# Altium PCB CT9042 Front Board.PcbDoc (part 2 of 2)
Units mm, origin at the board's own origin, x right, y up, seen from the top; angles counter-clockwise.
Board outline 238.25 x 69.25 mm, 4 copper layers (Top Layer, Layer 1, Layer 2, Bottom Layer), stack 1.794 mm thick; 120 components, 105 nets, 430 pads, 140 vias.
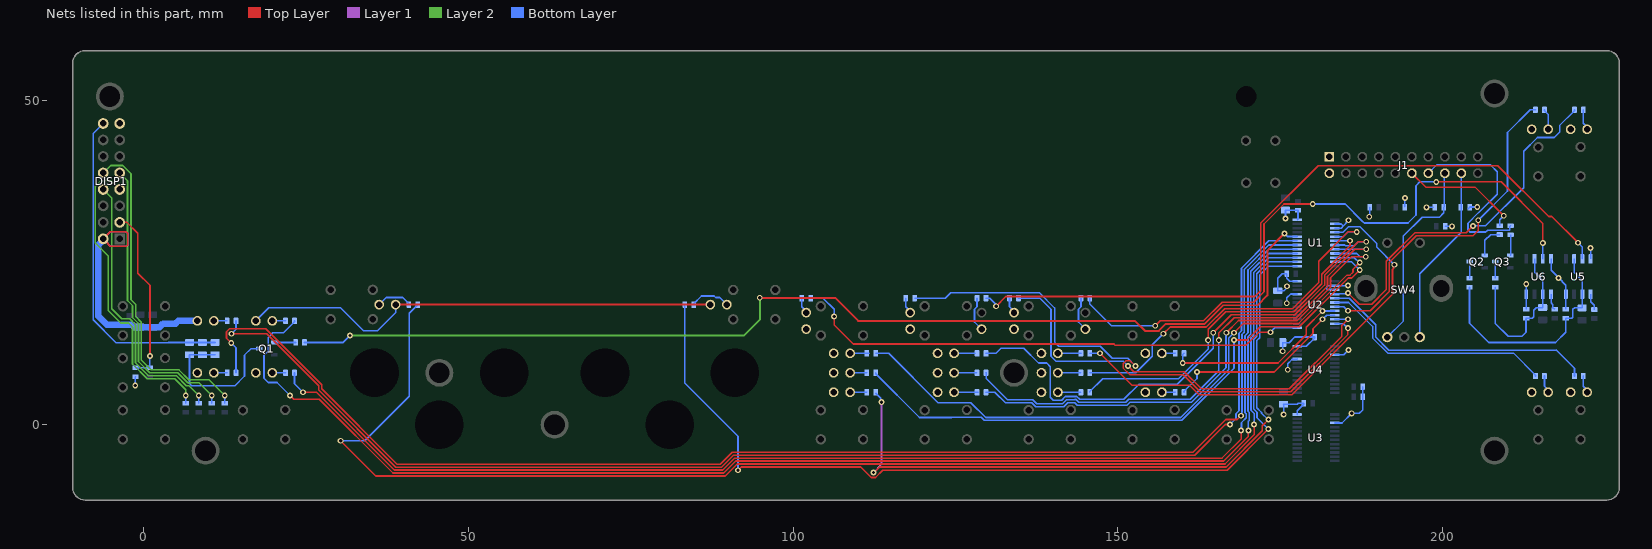
[diagram p4: the nets of this part, all layers, seen from the top]

## Via types
v1: diameter 0.9, hole 0.5, Top Layer to Bottom Layer, tented both sides, 123 vias
v2: diameter 0.9, hole 0.5, Top Layer to Bottom Layer, 17 vias

## Nets (pads, with @x,y where several pads share a name; then routed paths per layer and width w, separated by ;. In a path a pad name is that pad's centre, name@x,y a point inside that pad or via, vN(x,y) a via of type N, cw(c..) or ccw(c..) an arc to the next point about the centre after c; other vN are vias at no path point) (continued)
FP5VD: C1.1 C2.1 C3.1 C4.1 C5.1 C6.1 C7.1 C8.1 C9.1 C10.1 C11.1 D1.2 D2.2 D3.2 D4.2 D5.2 D6.2 D7.2 D8.2 D9.2 D10.2 D11.2 D12.2 D13.2 D14.2 D15.2 D16.2 D17.2 D18.2 D19.2 D20.2 D21.2 D22.2 D23.2 D24.2 DISP1.2 DISP1.15 J1.1 J1.2 R1.2 R2.2 R4.2 R29.2 R30.2 R34.2 R35.2 R159.2 R160.2 R164.2 U1.2 U1.3 U1.24 U2.2 U2.3 U2.21 U2.24 U3.3 U3.24 U4.3 U4.21 U4.24 U5.4 U5.8 U6.4 U6.8 | length 199.9
  Top Layer w0.2: DISP1.2@-6.282,28.617 -5.157,29.742 -2.783,29.742 -2.525,29.483 -2.525,27.675 -2.709,27.492 -5.157,27.492 -5.808,28.143 -5.882,28.143 DISP1.2@-5.95,28.075
  Top Layer w0.254: D3.2@38.771,18.509 D5.2@87.231,18.509
  Layer 1 w0.2: DISP1.2@-6.282,28.617 -5.157,29.742 -2.783,29.742 -2.525,29.483 -2.525,27.675 -2.709,27.492 -5.157,27.492 -5.808,28.143 -5.882,28.143 DISP1.2@-5.95,28.075
  Bottom Layer w0.2: R35.2@212.9,17.765 212.895,17.77 U6.8@212.895,20.1 212.897,20.102 212.897,21.672 v2(212.9,21.675) ; U6.4@216.705,25.55 216.705,23.776 v2(217.869,22.613) 218.995,21.486 U5.8@218.995,20.1 218.995,17.785 R34.2@218.975,17.765 ; v2(222.775,27.225) 222.79,27.21 222.79,25.565 U5.4@222.805,25.55
  Bottom Layer w0.254: v1(-1.325,6.025) -1.325,7.36 R4.2@-1.3,7.385 ; D6.2@17.23,16 19.23,18 30.263,18 33.763,14.5 36,14.5 38.77,17.27 D3.2@38.77,18.5 ; v1(175.375,11.325) 175.375,12.619 C11.1@175.404,12.648 176.398,12.648 177.25,13.5 C10.1@180.31,13.5 ; C9.1@175.49,3.14 C9.1@175.525,3.14 ; v1(175.525,1.575) C9.1@175.525,3.14 ; C5.1@175.807,33.05 175.837,33.02 C4.1@177.737,33.02 177.737,31.646 177.666,31.575 U1.24@177.6,31.575 ; v1(176,18.7) 176.027,18.727 176.027,19.535 176.617,20.125 U2.21@177.6,20.125 ; v1(176.025,21.325) 176.03,21.32 176.03,21.109 175.575,20.654 174.654,20.654 C7.1@174.625,20.625 174.604,20.646 174.604,22.554 175.325,23.275 175.954,23.275 176.01,23.219 176.01,22.548 176.483,22.075 U2.24@177.6,22.075 ; v1(176.15,8.475) 176.15,9.381 176.823,10.054 177.529,10.054 U4.21@177.6,10.125 ; U3.24@177.6,1.575 177.6,2.154 177.99,2.544 178.014,2.544 178.636,3.167 C8.1@178.636,3.302 177.777,3.302 177.621,3.146 ; 177.6,3.14 C9.1@175.525,3.14 ; U4.24@177.6,12.075 179.02,12.075 C10.1@180.31,13.365 ; U3.3@183.4,0.275 184.525,0.275 v1(186,1.75) 187.175,1.75 187.69,2.265 R29.2@187.69,4.325 R30.2@187.69,5.875 ; U4.3@183.4,10.775 184.775,10.775 v1(185.5,11.5) ; U2.3@183.4,20.775 182.294,20.775 182.145,20.924 182.145,21.276 182.294,21.425 U2.2@183.4,21.425 ; U1.3@183.4,30.275 184.377,30.275 184.702,30.6 ; U1.2@183.4,30.925 184.377,30.925 184.702,30.6 ; U2.2@183.471,21.425 v1(185.425,21.425) ; v1(185.5,31.5) 185.5,31.398 184.702,30.6 ; v1(188.7,32.041) 188.81,32.151 R159.2@188.81,33.5 ; R160.2@194.2,33.61 194.195,33.615 194.195,34.92 v1(194.2,34.925) ; v1(197.525,33.475) R2.2@198.587,33.475 ; R164.2@200.415,30.55 v1(201.45,30.55) ; R1.2@204,33.31 204.215,33.525 v1(205.35,33.525)
  Bottom Layer w0.3: v1@175.825,31.762 C5.1@175.825,32.9
  Bottom Layer w1: DISP1.2@-6.282,28.617 -6.282,28.441 -7,27.723 -7,16.722 -5.708,15.43 C1.1@-2.22,15.43 -1.85,15.43 -1.47,15.05 C2.1@-0.625,15.05 1.325,15.05 C3.1@1.338,15.037 ; C3.1@1.35,15.025 1.525,15.025 1.55,15.05 2.429,15.05 2.954,15.575 4.872,15.575 5.297,16 D4.2@8.23,16
  other v1: 175.813,31.75
LED-2mA: R18.2 U1.13 | length 107.4
  Top Layer w0.254: v1(112.35,-7.35) 112.469,-7.35 113.319,-6.5 166.683,-6.5 172.25,-0.933 172.25,-0.15 v1(173.2,0.8)
  Layer 1 w0.254: v1(112.35,-7.35) 113.6,-6.1 v1(113.6,3.475)
  Bottom Layer w0.254: R18.2@112.69,4.865 113.476,4.079 113.476,3.599 v1(113.6,3.475) ; v1(173.2,0.8) 173.106,0.8 172.123,1.783 172.123,1.894 171.398,2.619 171.398,12.972 171.843,13.417 171.843,23.068 173.2,24.425 U1.13@177.6,24.425
LED-20mA: R19.2 U1.11 | length 94.2
  Top Layer w0.254: v1(167.875,13.05) 169.877,13.05 171.901,15.074 177.948,15.074 185.469,22.594 186.019,22.594 v1(187.25,23.825)
  Bottom Layer w0.254: R19.2@112.69,8 112.69,7.865 119.432,1.123 124.413,1.123 124.437,1.147 128.961,1.147 129.439,0.669 159.845,0.669 167.877,8.701 167.877,13.048 v1(167.875,13.05) ; U1.11@183.4,25.075 186,25.075 v1(187.25,23.825)
LED-200mA: R20.2 U1.10 | length 95.8
  Top Layer w0.254: v1(167.875,14.175) 169.288,15.588 177.821,15.588 185.281,23.048 185.748,23.048 186.205,23.505 186.205,23.955 v1(187.25,25)
  Bottom Layer w0.254: R20.2@112.69,11 114.707,11 122.305,3.402 127.348,3.402 129.627,1.123 159.657,1.123 167.098,8.564 167.098,13.398 v1(167.875,14.175) ; U1.10@183.4,25.725 186.408,25.725 187.133,25 v1(187.25,25)
LED-ALT: R28.2 U2.8 | length 29
  Top Layer w0.254: v1(160,9.5) 174.649,9.5 179,13.851 179,15.025 v1(181.5,17.525)
  Bottom Layer w0.254: v1(160,9.5) 160,10.81 R28.2@160.19,11 ; v1(181.5,17.525) U2.8@183.4,17.525
LED-BACKLIGHT: R7.2 U1.20 | length 170.3
  Top Layer w0.3: v1(94.85,19.55) 106.45,19.55 110,16 152.625,16 154.175,14.45 156.319,14.45 157.394,15.525 163.375,15.525 166.252,18.402 171.51,18.402 173.029,19.92 173.029,26.829 v1(175.65,29.45)
  Layer 2 w0.3: v1(31.725,13.725) 92.4,13.725 94.85,16.175 v1(94.85,19.55)
  Bottom Layer w0.3: R7.2@24.74,12.675 30.675,12.675 v1(31.725,13.725) ; v1(175.65,29.45) 176.125,28.975 U1.20@177.6,28.975
LED-BIP: R12.2 U1.19 | length 202.8
  Top Layer w0.254: v1(13.5,14) 18.901,14 26.921,5.98 26.921,5.338 38.788,-6.529 88.946,-6.529 90.791,-4.684 161.816,-4.684 166.525,0.025 v1(167.25,0.025)
  Bottom Layer w0.254: v1(13.5,14) 14.19,14.69 R12.2@14.19,16 ; v1(167.25,0.025) 168.198,0.973 168.198,1.697 168.652,2.151 168.652,14.078 169.025,14.451 169.025,24.102 173.248,28.325 U1.19@177.6,28.325
LED-CHA: R16.2 U1.15 | length 206.8
  Top Layer w0.254: v1@30.162,-2.338 35.714,-7.891 89.51,-7.891 91.355,-6.046 166.495,-6.046 170.975,-1.566 v1(170.975,0.05)
  Bottom Layer w0.254: v1(30.301,-2.478) 34.022,-2.478 40.875,4.375 40.875,17.185 R16.2@42.19,18.5 ; v1(170.975,0.05) 170.975,1.758 170.49,2.243 170.49,13.348 170.935,13.793 170.935,23.444 173.216,25.725 U1.15@177.6,25.725
LED-CHB: R17.2 U1.14 | length 146.5
  Top Layer w0.254: v1(91.5,-7) 92,-6.5 110.401,-6.5 112.028,-8.127 112.672,-8.127 113.799,-7 166.825,-7 v1(173.175,-0.65)
  Bottom Layer w0.254: R17.2@83.31,18.5 83.31,6.415 91.5,-1.775 v1(91.5,-7) ; v1(173.175,-0.65) 171.429,1.096 171.429,1.946 170.944,2.431 170.944,13.16 171.389,13.605 171.389,23.256 173.208,25.075 U1.14@177.6,25.075
LED-FET: R15.2 U1.16 | length 205.7
  Top Layer w0.254: v1(22.5,4.5) 23.075,3.925 27,3.925 38.362,-7.437 89.322,-7.437 91.167,-5.592 166.307,-5.592 170.1,-1.799 v1(170.1,-0.875)
  Bottom Layer w0.254: v1(22.5,4.5) 20.5,6.5 19.167,6.5 18.5,7.167 18.5,10.675 19.125,11.3 19.125,13.445 19.855,14.175 21.5,14.175 23.19,15.865 R15.2@23.19,16 ; v1(170.1,-0.875) 170.1,0.552 170.206,0.658 170.206,1.885 170.036,2.055 170.036,13.536 170.481,13.981 170.481,23.632 173.224,26.375 U1.16@177.6,26.375
LED-I-VAR: R33.2 U2.11 | length 88.2
  Top Layer w0.254: v1(152.7,9.05) 151.923,9.827 151.253,9.827 150.798,9.372 150.798,8.728 151.851,7.675 160.084,7.675 162.69,5.069 176.602,5.069 185.425,13.892 v1(185.425,14.875)
  Bottom Layer w0.254: R33.2@118.69,19.5 123.427,19.5 124.249,20.322 137.917,20.322 140.25,17.989 140.25,12.733 140.906,12.077 147.272,12.077 149.13,10.219 151.531,10.219 v1(152.7,9.05) ; U2.11@183.4,15.575 184.725,15.575 v1(185.425,14.875)
LED-ILIMIT: J1.12 R36.2 | length 18.6
  Top Layer w0.254: J1.12@195.27,38.73 197.4,36.6 205,36.6 v2(209.425,32.175)
  Bottom Layer w0.254: R36.2@208.825,30.665 208.825,31.575 v2(209.425,32.175)
LED-MRK-1: R8.2 U2.7 | length 52.8
  Top Layer w0.254: v1(185.425,17.55) 188.842,17.55 191.798,20.506 191.798,24.972 195.953,29.127 204.702,29.127 205.5,29.925 v1(205.5,31.5)
  Bottom Layer w0.254: U2.7@183.4,18.175 184.8,18.175 v1(185.425,17.55) ; v1(205.5,31.5) 210,36 210,45 213.5,48.5 R8.2@214.31,48.5
LED-MRK-2: R11.2 U2.4 | length 56.6
  Top Layer w0.254: v1(185.425,20.3) 187.152,18.573 189.081,18.573 191.344,20.836 191.344,25.16 195.765,29.581 203.656,29.581 v1(204.7,30.625)
  Bottom Layer w0.254: U2.4@183.4,20.125 183.471,20.196 185.321,20.196 v1(185.425,20.3) ; v1(204.7,30.625) 206.625,30.625 212.5,36.5 212.5,42.125 214.615,44.24 217.215,44.24 218.025,45.05 218.025,46.08 220.31,48.365 R11.2@220.31,48.5
LED-MRK-A: R9.2 U2.6 | length 36.7
  Bottom Layer w0.254: U2.6@183.4,18.825 185.525,18.825 189.225,15.125 189.225,13.346 191.538,11.033 210.912,11.033 214.31,7.635 R9.2@214.31,7.5
LED-MRK-B: R10.2 U2.5 | length 43.7
  Bottom Layer w0.254: U2.5@183.4,19.475 185.624,19.475 189.7,15.399 189.7,13.513 191.726,11.487 217.487,11.487 217.5,11.5 220.31,8.69 R10.2@220.31,7.5
LED-NPN: R14.2 U1.17 | length 190.5
  Top Layer w0.254: v1(24.5,5) 26.567,5 38.55,-6.983 89.134,-6.983 90.979,-5.138 166.037,-5.138 168.975,-2.2 v1(168.975,-0.875)
  Bottom Layer w0.254: R14.2@23.19,8 23.19,6.31 v1(24.5,5) ; v1(168.975,-0.875) 169.03,-0.82 169.03,0.331 169.752,1.053 169.752,1.697 169.582,1.867 169.582,13.724 170.027,14.169 170.027,23.82 173.232,27.025 U1.17@177.6,27.025
LED-P-VAR: R32.2 U2.10 | length 68.3
  Top Layer w0.254: v1(151.575,9.05) 152.45,8.175 160.226,8.175 162.878,5.523 176.414,5.523 184.5,13.609 184.5,15.325 v1(185.425,16.25)
  Bottom Layer w0.254: R32.2@134.69,19.5 138,19.5 139.693,17.807 139.693,10.554 140.497,9.75 150.875,9.75 v1(151.575,9.05) ; U2.10@183.4,16.225 183.413,16.238 185.413,16.238 v1(185.425,16.25)
LED-PLIMIT: J1.14 R37.2 | length 29.9
  Bottom Layer w0.254: J1.14@197.81,38.73 199.08,40 207.375,40 208.425,38.95 208.425,35.501 205.599,32.675 205.55,32.675 203.923,31.048 203.923,29.952 204.195,29.68 206.653,29.68 206.945,29.972 209.403,29.972 209.425,29.95 210.326,29.95 210.326,30.491 R37.2@210.475,30.64
LED-PMAX4W: R26.2 U1.4 | length 72.6
  Top Layer w0.254: v1(147.25,11) 152.173,6.077 161.04,6.077 162.502,4.615 176.814,4.615 192.296,20.097 192.296,23.914 192.451,24.07 192.451,24.526 v1(192.575,24.65)
  Bottom Layer w0.254: R26.2@145.69,11 v1(147.25,11) ; U1.4@183.4,29.625 184.675,29.625 185.527,30.477 187.297,30.477 189.853,27.921 189.853,27.372 v1(192.575,24.65)
LED-PMAX40mW: R24.2 U1.6 | length 55.2
  Top Layer w0.254: v1(163.9,13.025) 163.9,13.851 163.898,13.853 163.898,14.497 163.9,14.499 163.9,14.683 166.621,17.404 177.069,17.404 181.379,21.714 181.379,23.199 185.75,27.57 v1(185.75,28.325)
  Bottom Layer w0.254: R24.2@145.69,5 145.69,5.135 147.647,7.092 159.333,7.092 163.9,11.659 v1(163.9,13.025) ; U1.6@183.4,28.325 v1(185.75,28.325)
LED-PMAX400mW: R25.2 U1.5 | length 56.7
  Top Layer w0.254: v1(157,14) 158.048,15.048 163.623,15.048 166.446,17.871 170.548,17.871 170.552,17.875 176.898,17.875 180.925,21.902 180.925,25.196 185.429,29.7 v1(186.775,29.7)
  Bottom Layer w0.254: R25.2@145.69,8 152.753,8 155.307,10.554 155.307,12.307 v1(157,14) ; U1.5@183.4,28.975 184.704,28.975 185.429,29.7 v1(186.775,29.7)
LED-PNP: R13.2 U1.18 | length 207.9
  Top Layer w0.254: v1(13.45,12.6) 12.723,13.327 12.723,14.322 13.178,14.777 18.766,14.777 27.375,6.168 27.375,5.526 38.976,-6.075 88.758,-6.075 90.603,-4.23 161.578,-4.23 166.61,0.802 168.373,0.802 168.946,1.375 v1(168.975,1.375)
  Bottom Layer w0.254: v1(13.45,12.6) 14.19,11.86 R13.2@14.19,8 ; v1(168.975,1.375) 169.099,1.499 169.099,1.955 169.106,1.963 169.106,13.89 169.479,14.263 169.479,23.914 173.24,27.675 U1.18@177.6,27.675
LED-RUNSTOP: R27.2 U2.9 | length 29.2
  Top Layer w0.254: v1(162.175,8.125) 174.076,8.125 180.052,14.101 180.052,14.802 v1(181.5,16.25)
  Bottom Layer w0.254: R27.2@160.19,5 160.19,5.135 162.175,7.12 v1(162.175,8.125) ; v1(181.5,16.25) 181.525,16.25 182.15,16.875 U2.9@183.4,16.875
LED-V-VAR: R31.2 U2.13 | length 80.4
  Top Layer w0.254: v1(106.3,16.65) 106.3,15.371 109.24,12.431 149.41,12.431 149.593,12.248 169.7,12.248 170.048,12.596 170.065,12.596 171.719,14.25 v1(173.5,14.25)
  Bottom Layer w0.254: R31.2@102.69,19.5 104.594,19.5 106.3,17.794 v1(106.3,16.65) ; v1(173.5,14.25) 174.175,14.925 U2.13@177.6,14.925
LED-VMAX2V: R21.2 U1.9 | length 78.3
  Top Layer w0.254: v1(166.7,14.175) 168.567,16.042 177.633,16.042 182.741,21.15 182.741,22.635 185.981,25.875 v1(188.175,25.875)
  Bottom Layer w0.254: R21.2@129.69,5 131.058,5 132.681,3.377 136.717,3.377 137.326,2.768 141.649,2.768 142.283,3.402 143.359,3.402 143.761,3 151.406,3 151.856,3.45 161.342,3.45 166.644,8.752 166.644,14.119 v1(166.7,14.175) ; U1.9@183.4,26.375 186.8,26.375 187.3,25.875 v1(188.175,25.875)
LED-VMAX10V: R22.2 U1.8 | length 80.4
  Top Layer w0.254: v1(165.55,13.025) 165.55,14.124 167.922,16.496 177.445,16.496 182.287,21.338 182.287,22.823 186.494,27.03 v1(188.25,27.03)
  Bottom Layer w0.254: R22.2@129.69,8 129.702,7.988 129.702,7.124 132.995,3.831 136.905,3.831 137.514,3.222 141.461,3.222 142.095,3.856 143.357,3.856 143.405,3.904 143.499,3.904 143.565,3.838 143.949,3.454 151.218,3.454 151.668,3.904 161.154,3.904 165.55,8.3 v1(165.55,13.025) ; U1.8@183.4,27.025 v1@188.246,27.025
LED-VMAX40V: R23.2 U1.7 | length 82.9
  Top Layer w0.254: v1(164.675,14.175) 167.45,16.95 177.257,16.95 181.833,21.526 181.833,23.011 186.997,28.175 v1(188.25,28.175)
  Bottom Layer w0.254: R23.2@129.69,11 131.221,11 132,11.779 135.508,11.779 137.787,9.5 139.021,9.5 139.571,8.95 139.571,4.254 140.044,3.781 141.331,3.781 141.908,4.358 143.217,4.358 143.593,4.358 143.687,4.358 144.137,3.908 150.908,3.908 153.252,6.252 159.135,6.252 164.677,11.794 164.677,14.173 v1(164.675,14.175) ; U1.7@183.4,27.675 184.936,27.675 185.063,27.548 186.381,27.548 187.008,28.175 v1(188.25,28.175)
NetC12_1: C12.1 R34.1 R38.2 U5.2 U5.6 | length 36.4
  Bottom Layer w0.2: R34.1@218.975,16.385 219.91,16.385 220.075,16.55 220.075,17.75 220.325,18 C12.1@221.5,18 221.535,18.035 U5.6@221.535,20.1 221.535,22.19 220.265,23.46 U5.2@220.265,25.55
  Bottom Layer w0.254: R38.2@204.15,21.185 204.15,15.65 207.125,12.675 217.4,12.675 218.975,14.25 R34.1@218.975,16.385
NetC13_1: C13.1 R35.1 R39.2 U6.2 U6.6 | length 25.4
  Bottom Layer w0.2: R35.1@212.9,16.385 213.785,16.385 214.05,16.65 214.05,17.633 214.467,18.05 C13.1@215.425,18.05 215.435,18.06 U6.6@215.435,20.1 215.435,22.19 214.165,23.46 U6.2@214.165,25.55
  Bottom Layer w0.254: R39.2@208.125,21.16 208.125,15.585 210.105,13.605 212.23,13.605 212.85,14.225 212.85,16.335 R35.1@212.9,16.385
NetC14_1: C14.1 U5.5 | length 2.6
  Bottom Layer w0.2: U5.5@222.805,20.1 222.805,18.97 223.375,18.4 C14.1@223.375,17.74
NetC15_1: C15.1 U6.5 | length 2.6
  Bottom Layer w0.2: U6.5@216.705,20.1 216.705,18.795 216.995,18.505 216.995,18.025 217.255,17.765 C15.1@217.3,17.765
NetD1_1: D1.1 R11.1 | length 3.2
  Bottom Layer w0.254: R11.1@221.69,48.5 221.69,46.437 222.272,45.855 D1.1@222.272,45.518
NetD2_1: D2.1 R8.1 | length 3.2
  Bottom Layer w0.254: R8.1@215.69,48.5 215.69,48.365 216.272,47.783 D2.1@216.272,45.518
NetD3_1: D3.1 R16.1 | length 5.6
  Bottom Layer w0.254: D3.1@36.231,18.509 37.308,19.586 39.859,19.586 40.81,18.635 R16.1@40.81,18.5
NetD4_1: D4.1 R12.1 | length 2
  Bottom Layer w0.2: D4.1@10.77,16 R12.1@12.81,16
NetD5_1: D5.1 R17.1 | length 6.3
  Bottom Layer w0.254: R17.1@84.69,18.5 84.69,18.635 85.882,19.827 87.8,19.827 88.041,19.586 88.694,19.586 D5.1@89.771,18.509
NetD6_1: D6.1 R15.1 | length 2
  Bottom Layer w0.254: D6.1@19.771,16.009 21.801,16.009 R15.1@21.81,16
NetD7_1: D7.1 R20.1 | length 2.9
  Bottom Layer w0.254: D7.1@108.771,11.009 108.78,11 111.67,11
NetD8_1: D8.1 R23.1 | length 3.2
  Bottom Layer w0.254: D8.1@124.77,11 R23.1@128,11
NetD9_1: D9.1 R26.1 | length 3.5
  Bottom Layer w0.254: D9.1@140.77,11 143.81,11 R26.1@144.31,11
NetD10_1: D10.1 R28.1 | length 2
  Bottom Layer w0.254: D10.1@156.771,11.009 158.801,11.009 R28.1@158.81,11
NetD11_1: D11.1 R13.1 | length 2
  Bottom Layer w0.254: D11.1@10.77,8 R13.1@12.81,8
NetD12_1: D12.1 R14.1 | length 2
  Bottom Layer w0.254: D12.1@19.771,8.009 21.801,8.009 R14.1@21.81,8
NetD13_1: D13.1 R19.1 | length 2.5
  Bottom Layer w0.254: D13.1@108.771,8.009 111.301,8.009 R19.1@111.31,8
NetD14_1: D14.1 R22.1 | length 3.5
  Bottom Layer w0.254: D14.1@124.77,8 127.31,8 R22.1@128.25,8
NetD15_1: D15.1 R25.1 | length 3.5
  Bottom Layer w0.254: D15.1@140.77,8 R25.1@144.25,8
NetD16_1: D16.1 R18.1 | length 2.5
  Bottom Layer w0.254: D16.1@108.771,5.009 111.301,5.009 R18.1@111.31,5
NetD17_1: D17.1 R21.1 | length 3.7
  Bottom Layer w0.254: D17.1@124.77,5 127.31,5 ; 127.31,5 R21.1@128.5,5
NetD18_1: D18.1 R24.1 | length 3.5
  Bottom Layer w0.254: D18.1@140.77,5 R24.1@144.25,5
NetD19_1: D19.1 R27.1 | length 2
  Bottom Layer w0.254: D19.1@156.771,5.009 158.801,5.009 R27.1@158.81,5
NetD20_1: D20.1 R10.1 | length 2.7
  Bottom Layer w0.254: R10.1@221.69,7.5 221.69,5.927 222.271,5.346 D20.1@222.271,5.009
NetD21_1: D21.1 R9.1 | length 2.7
  Bottom Layer w0.254: R9.1@215.69,7.5 215.69,5.927 216.271,5.346 D21.1@216.271,5.009
NetD22_1: D22.1 R31.1 | length 2.5
  Bottom Layer w0.254: R31.1@101.31,19.5 101.31,18.179 102,17.489 D22.1@102,17.27
NetD23_1: D23.1 R33.1 | length 2.5
  Bottom Layer w0.254: R33.1@117.31,19.5 117.31,18.179 118,17.489 D23.1@118,17.25
NetD24_1: D24.1 R32.1 | length 2.5
  Bottom Layer w0.254: R32.1@133.31,19.5 133.31,18.179 134,17.489 D24.1@134,17.25
NetD40_2: D40.2 R165.1 | length 5.4
  Bottom Layer w0.254: R165.1@128.31,19.5 128.31,18.171 127.923,17.784 127.923,15.807 D40.2@129,14.73
NetD47_2: D47.2 R166.1 | length 5.4
  Bottom Layer w0.254: R166.1@144.31,19.5 144.31,18.171 143.923,17.784 143.923,15.807 D47.2@145,14.73
NetDISP1_3: DISP1.3 R4.1 R161.2 | length 27.2
  Top Layer w0.254: DISP1.3@-3.742,31.157 -2.602,31.157 -0.932,29.487 -0.932,23.353 0.925,21.495 v1(0.925,10.575)
  Bottom Layer w0.254: R4.1@-1.3,8.765 -1.288,8.777 0.888,8.777 R161.2@0.9,8.79 0.9,10.55 v1(0.925,10.575)
NetDISP1_7: DISP1.7 R3.1 | length 47.1
  Layer 2 w0.254: DISP1.7@-3.742,36.237 -5.055,37.55 -6.675,37.55 -7.5,36.725 -7.5,28 -5.5,26 -5.5,17.606 -3.572,15.678 -2.322,15.678 -1.75,15.106 -1.75,9.355 0.525,7.08 4.745,7.08 6.45,5.375 v1(6.45,4.5)
  Bottom Layer w0.254: R3.1@6.45,3.29 v1(6.45,4.5)
NetDISP1_8: DISP1.8 R5.1 | length 42.5
  Layer 2 w0.254: DISP1.8@-6.282,36.237 -4.975,34.93 -4.975,17.875 -3.422,16.322 -2.203,16.322 -1.296,15.415 -1.296,9.543 0.713,7.534 5.021,7.534 6.54,6.015 6.935,6.015 v1(8.45,4.5)
  Bottom Layer w0.254: R5.1@8.45,3.29 v1(8.45,4.5)
NetDISP1_9: DISP1.9 R157.1 | length 44.9
  Layer 2 w0.254: DISP1.9@-3.742,38.777 -2.525,37.56 -2.525,19.119 -1.756,18.35 -1.756,16.517 -0.842,15.603 -0.842,9.731 0.901,7.988 5.209,7.988 6.728,6.469 8.481,6.469 v1(10.45,4.5)
  Bottom Layer w0.254: R157.1@10.45,3.29 v1(10.45,4.5)
NetDISP1_10: DISP1.10 R158.1 | length 51
  Layer 2 w0.254: DISP1.10@-6.282,38.777 -5.13,39.929 -3.265,39.929 -2,38.664 -2,19.236 -1.277,18.513 -1.277,16.68 -0.388,15.791 -0.388,9.96 1.13,8.442 5.397,8.442 6.916,6.923 10.027,6.923 v1(12.45,4.5)
  Bottom Layer w0.254: R158.1@12.45,3.29 v1(12.45,4.5)
NetDISP1_16: DISP1.16 R6.2 R162.2 R163.2 | length 51.1
  Bottom Layer w0.254: DISP1.16@-6.282,46.397 -7.827,44.851 -7.827,16.15 -4.3,12.623 3.717,12.623 3.769,12.675 R162.2@7.025,12.675 R163.2@9,12.675 R6.2@10.95,12.675
NetQ1_1: Q1.1 R7.1 | length 3.3
  Bottom Layer w0.254: Q1.1@20.075,12.675 R7.1@23.36,12.675
NetQ1_3: Q1.3 R6.1 R162.1 R163.1 | length 23.5
  Bottom Layer w0.254: R6.1@10.95,10.775 R163.1@9,10.775 R162.1@7.025,10.775 7.025,6.35 7.35,6.025 14.025,6.025 15.5,7.5 15.5,10.725 16.5,11.725 Q1.3@17.775,11.725
NetQ2_1: Q2.1 R36.1 | length 5
  Bottom Layer w0.2: Q2.1@206.475,26.075 206.475,28.375 207.385,29.285 R36.1@208.825,29.285
NetQ2_3: Q2.3 R38.1 | length 2.6
  Bottom Layer w0.2: R38.1@204.15,22.565 204.153,22.567 204.153,25.102 Q2.3@204.175,25.125
NetQ3_1: Q3.1 R37.1 | length 3.2
  Bottom Layer w0.2: Q3.1@210.45,26.075 210.473,26.097 210.473,29.258 R37.1@210.475,29.26
NetQ3_3: Q3.3 R39.1 | length 2.6
  Bottom Layer w0.2: R39.1@208.125,22.54 208.127,22.542 208.127,25.102 Q3.3@208.15,25.125
NetR165_2: R165.2 U5.3 | length 114.6
  Top Layer w0.254: v1(131.25,18.25) 132.75,19.75 171.093,19.75 172,20.657 172,31.067 180.833,39.9 208.525,39.9 216.35,32.075 216.825,32.075 v2(220.875,28.025)
  Bottom Layer w0.254: R165.2@129.69,19.5 130.25,19.5 131.25,18.5 v1(131.25,18.25) ; v2(220.875,28.025) 221.535,27.365 U5.3@221.535,25.55
NetR166_2: R166.2 U6.3 | length 100.6
  Top Layer w0.254: v1(155.75,15.25) 156.502,16.002 163.177,16.002 166.054,18.879 170.914,18.879 172.5,20.465 172.5,30.925 175.575,34 v1(180,34) ; v2(199.025,37.4) 209.05,37.4 215.45,31 v2(215.45,28)
  Bottom Layer w0.254: R166.2@145.69,19.5 145.69,18.56 149.027,15.223 155.723,15.223 v1(155.75,15.25) ; v1(180,34) 185,34 187.639,31.361 187.925,31.075 194.674,31.075 195.905,32.306 195.905,36.825 196.48,37.4 v2(199.025,37.4) ; U6.3@215.435,25.55 215.443,25.558 215.443,27.992 v2(215.45,28)
ROT-PHA: J1.16 R2.1 SW4.A | length 30.3
  Bottom Layer w0.254: SW4.A@191.5,13.5 193.973,15.973 193.973,29.098 196.85,31.975 199.525,31.975 200.19,32.64 R2.1@200.19,33.5 ; R2.1@200.27,33.58 200.27,38.65 J1.16@200.35,38.73
ROT-PHB: J1.18 R1.1 SW4.B | length 27.6
  Bottom Layer w0.254: SW4.B@196.479,13.759 196.479,23.25 202.89,29.661 202.89,33.5 J1.18@202.89,38.73
pads on no net: J1.7 SW1.2 SW1.3 SW2.1 SW2.4 SW3.1 SW3.4 SW4.M1 SW4.M2 SW5.2 SW5.3 SW6.1 SW6.4 SW7.1 SW7.4 SW8.2 SW8.3 SW9.2 SW9.3 SW10.2 SW10.3 SW11.2 SW11.3 SW12.1 SW12.4 SW14.2 SW14.3 SW15.1 SW15.4 SW16.1 SW16.4 SW17.1 SW17.4 SW18.1 SW18.4 SW19.2 SW19.3 SW20.1 SW20.4 U1.1 U2.1 U2.14 U2.15 U2.16 U2.17 U2.18 U2.19 U2.20 U4.7 U4.8 U4.9 U4.10 U4.11 U4.13 U4.14 U4.15 U4.16 U4.17 U4.18 U4.19 U4.20 U5.7 U6.7
copper on no net: | length 1.5
  Bottom Layer w0.254: 144.997,19.821 145,19.818 145,18.347

## Polygon pours and split planes (outlines as drawn)
FGND on Layer 1 "AGND" (solid, remove dead copper, pour order 0): 231,-13 231,59 -14,59 -14,-13
FP5VD on Layer 2 "AGND" (solid, remove dead copper, pour order 1): 231,-13 231,59 -14,59 -14,-13 229,-13
FGND on Top Layer "AGND" (solid, remove dead copper, pour order 3): -13.127,58.127 -13.127,-11.489 228.873,-11.489 228.873,58.127
FGND on Bottom Layer "AGND" (solid, remove dead copper, pour order 2): -13,58 -13,-11.616 229,-11.616 229,58

## Keep-outs
Keep-Out Layer:
  lines w1: 165.951,22.709 cw(c165.451,22.709) 165.451,22.209 4.051,22.209 cw(c4.051,22.709) 3.551,22.709 3.55,25.493 ccw(c3.05,25.493) 3.05,25.993 1.875,25.993 cw(c1.875,26.493) 1.375,26.493 1.375,48.125 cw(c1.875,48.125) 1.875,48.625 3.05,48.625 ccw(c3.05,49.125) 3.55,49.125 3.55,51.909 3.551,51.909 cw(c4.051,51.909) 4.051,52.409 165.451,52.409 cw(c165.451,51.909) 165.951,51.909 ; 165.951,22.709 165.952,22.709 ; 165.952,22.709 165.952,25.493 cw(c166.452,25.493) 166.452,25.993 167.627,25.993 ccw(c167.627,26.493) 168.127,26.493 168.127,48.125 ccw(c167.627,48.125) 167.627,48.625 166.452,48.625 cw(c166.452,49.125) 165.952,49.125 165.952,51.909 ; 165.951,51.909 165.952,51.909 ; -10.999,-9.616 -10.999,55.634 -10.96,56.024 -10.847,56.399 -10.662,56.745 -10.413,57.048 -10.11,57.297 -9.764,57.482 -9.389,57.596 -8.999,57.634 225.251,57.634 225.641,57.596 226.016,57.482 226.362,57.297 226.665,57.048 226.914,56.745 227.099,56.399 227.213,56.024 227.251,55.634 227.251,-9.616 227.213,-10.006 227.099,-10.381 226.914,-10.727 226.665,-11.03 226.362,-11.279 226.016,-11.464 225.641,-11.578 225.251,-11.616 -8.999,-11.616 -9.389,-11.578 -9.764,-11.464 -10.11,-11.279 -10.413,-11.03 -10.662,-10.727 -10.847,-10.381 -10.96,-10.006 -10.999,-9.616

## Silkscreen, mask and mechanical layers (free items; w line width, h text height)
Top Overlay:
  drawing of 75 lines, arcs and shapes, not listed
  text "SILICONVALLEYGARAGE" at 203.125,25.9 h2.3
  text "INSTRUMENTS" at 203.125,21.246 h2.3
  text "0" at 205.045,15.58 h5
  text "PUBLIC / DOMAIN" at 208.186,15.13 h2.5
  text "https://github.com/vincent-himpe/CurveTraceNew" at 188.166,8.783 h2
FACEPLATE:
  lines w0.05: 3.55,22.709 3.55,25.493 ccw(c3.05,25.493) 3.05,25.993 1.875,25.993 cw(c1.875,26.493) 1.375,26.493 1.375,48.125 cw(c1.875,48.125) 1.875,48.625 3.05,48.625 ccw(c3.05,49.125) 3.55,49.125 3.55,51.909 ; 3.551,22.709 ccw(c4.051,22.709) 4.051,22.209 165.451,22.209 ccw(c165.451,22.709) 165.951,22.709 165.952,25.493 cw(c166.452,25.493) 166.452,25.993 167.627,25.993 ccw(c167.627,26.493) 168.127,26.493 168.127,48.125 ccw(c167.627,48.125) 167.627,48.625 166.452,48.625 cw(c166.452,49.125) 165.952,49.125 165.952,51.909 ccw(c165.451,51.909) 165.451,52.409 4.051,52.409 ccw(c4.051,51.909) 3.551,51.909
  lines w0.2: 165.951,48.075 173.251,48.075 173.251,54.059
Top 3D Body:
  lines w0.15: -12.999,-8.152 -10.999,-8.152 ; -10,-13.025 -8,-13.025
FRONT GRAPHICS:
  drawing of 227 lines, arcs and shapes, not listed
  text "SILICONVALLEYGARAGE" at -7,52 h2.3
  text "MARKER / TRACE" at 166,50 h4
  text "CT9084 Curve Tracer" at 14.992,48.688 h7
  text "INSTRUMENTS" at -7,47.346 h2.3
  text "1" at 214.661,47.202 h3
  text "2" at 220.476,47.206 h3
  text "Marker" at 164,45.879 h4
  text "Page" at 169.514,44.975 h3
  text "SETUP" at -5,23.5 h4
  text "DUT" at 29,23.5 h4
  text "Vmax" at 102,23.5 h4
  text "Imax" at 118,23.5 h4
  text "Pmax" at 134,23.5 h4
  text "Run" at 150,23.5 h4
  text "VAR" at 100,20.211 h3
  text "VAR" at 116,20.211 h3
  text "VAR" at 132,20.211 h3
  text "ALT" at 148,20.211 h3
  text "A" at 35.001,19.25 h4
  text "B" at 86,19.25 h4
  text "BIPOLAR" at 4.843,18.211 h3
  text "FET" at 16.761,18.211 h3
  text "VAR" at 100.474,17.974 h2
  text "VAR" at 116.474,17.974 h2
  text "VAR" at 132.474,17.974 h2
  text "!" at 144.864,17.775 h2
  text "40V" at 110.271,10.447 h2.1
  text "200mA" at 124.773,10.456 h2.1
  text "4W" at 140.771,10.447 h2.1
  text "P" at 8.925,10.211 h3
  text "N" at 17.792,10.211 h3
  text "10V" at 110.27,7.444 h2.1
  text "20mA" at 124.773,7.456 h2.1
  text "0.4W" at 140.77,7.447 h2.1
  text "A" at 214.221,6.711 h3
  text "B" at 220.408,6.711 h3
  text "2mA" at 124.773,4.447 h2.1
  text "40mW" at 140.771,4.447 h2.1
  text "2V" at 110.271,4.438 h2.1
  text "Setup" at 15.53,-5.544 h3
  text "DUT" at 215.801,-5.776 h3
  text "Select" at 166.425,-5.821 h3
  text "Trace" at 183.741,-6.034 h4
  text "Range" at 100,-6.054 h3
  text "Range" at 116,-6.054 h3
  text "Range" at 132,-6.054 h3
  text "Run/Stop" at 148,-6.062 h3
  text "Power" at -4.999,-7.528 h4
Board:
  lines w0.05: 8.551,29.059 9.551,29.059 161.051,29.059 161.051,45.559 8.551,45.559 8.551,37.309 8.551,29.059
  lines w0.1: -10.999,-9.616 -10.96,-10.006 -10.847,-10.381 -10.662,-10.727 -10.413,-11.03 -10.11,-11.279 -9.764,-11.464 -9.389,-11.578 -8.999,-11.616 225.251,-11.616 225.641,-11.578 226.016,-11.464 226.362,-11.279 226.665,-11.03 226.914,-10.727 227.099,-10.381 227.213,-10.006 227.251,-9.616 227.251,55.634 227.213,56.024 227.099,56.399 226.914,56.745 226.665,57.048 226.362,57.297 226.016,57.482 225.641,57.596 225.251,57.634 -8.999,57.634 -9.389,57.596 -9.764,57.482 -10.11,57.297 -10.413,57.048 -10.662,56.745 -10.847,56.399 -10.96,56.024 -10.999,55.634 -10.999,-9.616 ; -8.749,-8.316 224.751,-8.316 224.751,54.334 -8.749,54.334 -8.749,-8.316
  text "BORDER" at 98.829,-10.435 h3

## Text inside footprints (layer, text, board x,y; h text height)
D1: Top Overlay "+" at 217.95,45.15 h0.8
D2: Top Overlay "+" at 211.95,45.15 h0.8
D3: Top Overlay "+" at 40.55,18.85 h0.8 r180
D4: Top Overlay "+" at 6.45,15.65 h0.8
D5: Top Overlay "+" at 85.45,18.15 h0.8
D6: Top Overlay "+" at 15.45,15.65 h0.8
D7: Top Overlay "+" at 104.45,10.65 h0.8
D8: Top Overlay "+" at 120.45,10.65 h0.8
D9: Top Overlay "+" at 136.45,10.65 h0.8
D10: Top Overlay "+" at 152.45,10.65 h0.8
D11: Top Overlay "+" at 6.45,7.65 h0.8
D12: Top Overlay "+" at 15.45,7.65 h0.8
D13: Top Overlay "+" at 104.45,7.65 h0.8
D14: Top Overlay "+" at 120.45,7.65 h0.8
D15: Top Overlay "+" at 136.45,7.65 h0.8
D16: Top Overlay "+" at 104.45,4.65 h0.8
D17: Top Overlay "+" at 120.45,4.65 h0.8
D18: Top Overlay "+" at 136.45,4.65 h0.8
D19: Top Overlay "+" at 152.45,4.65 h0.8
D20: Top Overlay "+" at 217.95,4.65 h0.8
D21: Top Overlay "+" at 211.95,4.65 h0.8
D22: Top Overlay "+" at 102.35,12.95 h0.8 r90
D23: Top Overlay "+" at 118.35,12.95 h0.8 r90
D24: Top Overlay "+" at 134.35,12.95 h0.8 r90
D40: Top Overlay "+" at 129.35,12.95 h0.8 r90
D47: Top Overlay "+" at 145.35,12.95 h0.8 r90
J1: Mechanical 13 "1" at 183.32,42.02 h0.3 r90
U1: Mechanical 13 "1" at 184.125,31.377 h0.3
U2: Mechanical 13 "1" at 184.125,21.877 h0.3
U3: Mechanical 13 "1" at 184.125,1.377 h0.3
U4: Mechanical 13 "1" at 184.125,11.877 h0.3
U5: Bottom Assembly "1" at 219.295,26.275 h0.3 r90
U6: Bottom Assembly "1" at 213.195,26.275 h0.3 r90